# Altium PCB PCB1.PcbDoc
Units mil, origin at the board's own origin, x right, y up, seen from the top; angles counter-clockwise.
Board outline 1181.1 x 3897.64 mil, 2 copper layers (Top Layer, Bottom Layer); 49 components, 36 nets, 156 pads, 0 vias.
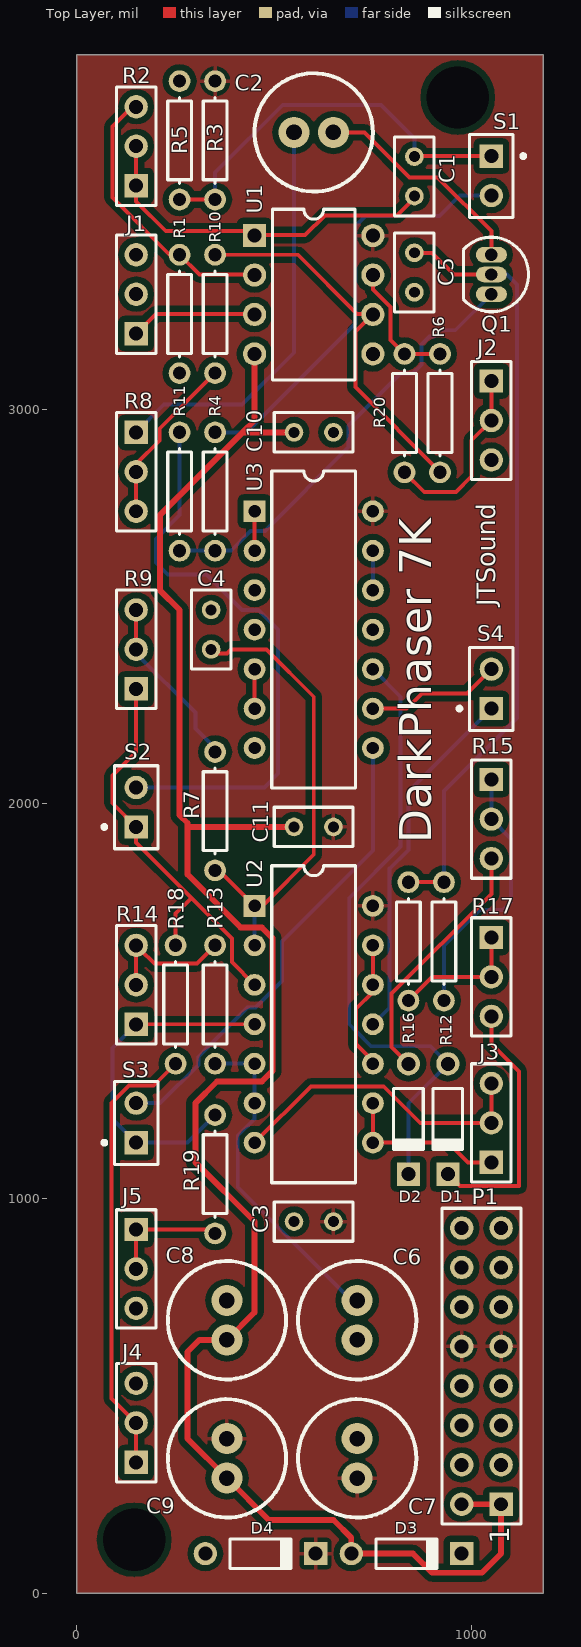
[diagram p0: Top Layer view]
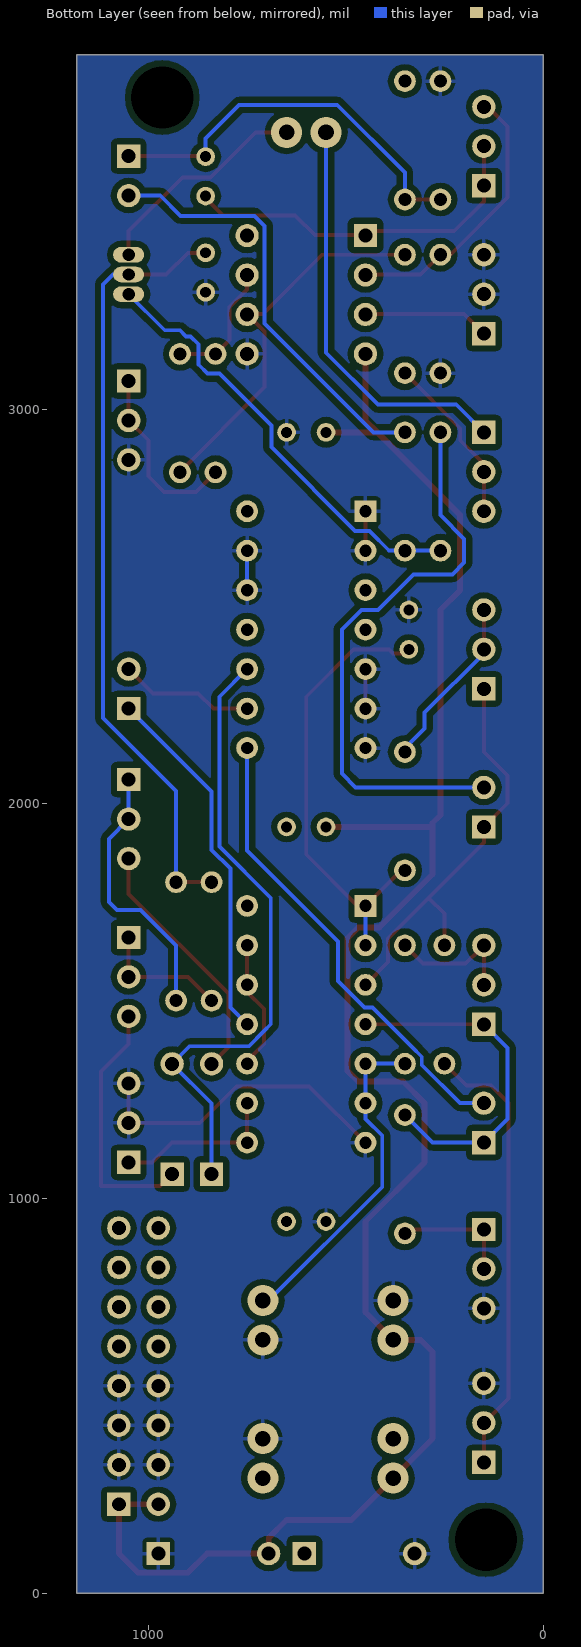
[diagram p1: Bottom Layer view, seen from below]

## Layer stack, top to bottom
Top Solder: solder mask 0.4, Solder Resist, Dk 3.5
Top Layer: signal copper 1.4
Dielectric 1: dielectric 12.6, FR-4, Dk 4.8
Bottom Layer: signal copper 1.4
Bottom Solder: solder mask 0.4, Solder Resist, Dk 3.5

## Board outline
0,3897.64 1181.1,3897.64 1181.1,0 0,0

## Design rules (kind name [scope] priority, off if disabled: settings)
Clearance [All] p1: gap=10 ignorepadtopadclearanceinfootprint=FALSE except(0: Arc-Hole Track-Hole SMDPad-Hole THPad-Hole Via-Hole Fill-Hole Poly-Hole Region-Hole Text-Hole; 15: Arc-Fill Arc-Poly Arc-Region Track-Fill Track-Poly Track-Region SMDPad-Fill SMDPad-Poly SMDPad-Region THPad-Fill THPad-Poly THPad-Region Via-Fill Via-Poly Via-Region Fill-Fill Fill-Poly Fill-Region Poly-Poly Poly-Region Region-Region)
PolygonConnect [All] p1: connectstyle=Relief reliefconductorwidth=10 reliefentries=4 polygonreliefangle="90 Angle" airgapwidth=10
RoutingVias [All] p1: holewidth=28 width=50 viastyle="Through Hole" minholewidth=28 minwidth=50 maxholewidth=28 maxwidth=50
SolderMaskExpansion [All] p1: expansion=4
Width [All] p1: maxlimit=50 minlimit=10 preferedwidth=20
30 further rules are at their usual default settings.

## Components (designator, comment, footprint, x,y, rotation, side; value= is the part's Value field where it differs from the comment)
C1 "Cap" RAD-0.1 855,3590 r270 top value=100n
C2 "Cap Pol1" "Cap Radial" 650,3701.34 r180 top value=10u
C3 "Cap" RAD-0.1 600,941.34 r180 top value=100pF
C4 "Cap" RAD-0.1 340,2441.34 r270 top value=330n
C5 "Cap Pol1" RAD-0.1 855,3346.34 r270 top value=1u
C6 "Cap Pol1" "Cap Radial" 710,741.34 r270 top value=4u7
C7 "Cap Pol1" "Cap Radial" 710,291.34 r90 top value=10u
C8 "Cap Pol1" "Cap Radial" 380,641.34 r90 top value=10u
C9 "Cap Pol1" "Cap Radial" 380,391.34 r270 top value=10u
C10 "Cap" RAD-0.1 600,2941.34 r180 top value=100pF
C11 "Cap" RAD-0.1 600,1941.34 r0 top value=100pF
D1 "Diode 1N4148" DO-35 940,1201.34 r270 top
D2 "Diode 1N4148" DO-35 840,1201.34 r270 top
D3 "Diode 1N4148" DO-35 835,100 r0 top
D4 "Diode 1N4148" DO-35 465,100 r0 top
J1 "Ext In" HDR1X3 150,3191.34 r90 top
J2 "Ext In" HDR1X3 1050,3071.34 r270 top
J3 "Ext Ctrl" HDR1X3 1050,1091.34 r90 top
J4 "OscOut" HDR1X3 150,331.34 r90 top
J5 "LFOOut" HDR1X3 150,921.34 r270 top
P1 "PowerBus" HDR2X8_CEN 1075,225 r90 top
Q1 "2N7000" SOT54 1050,3341.34 r180 top
R1 "" AXIAL-0.3 260,3241.34 r270 top value=10k
R2 "InGain" HDR1X3 150,3566.34 r90 top value=100k
R3 "" AXIAL-0.3 350,3681.34 r270 top value=10k
R4 "" AXIAL-0.3 350,2791.34 r270 top value=1k
R5 "" AXIAL-0.3 260,3681.34 r90 top value=10k
R6 "" AXIAL-0.3 920,2990 r270 top value=4k7
R7 "" AXIAL-0.3 350,1981.34 r90 top value=100R
R8 "OutGain" HDR1X3 150,2941.34 r270 top value=100k
R9 "FREQ" HDR1X3 150,2291.34 r90 top value=1K
R10 "" AXIAL-0.3 350,3241.34 r270 top value=10k
R11 "" AXIAL-0.3 260,2791.34 r270 top value=1k
R12 "" AXIAL-0.3 930,1651.34 r90 top value=1k
R13 "" AXIAL-0.3 350,1491.34 r90 top value=4k7
R14 "LFO" HDR1X3 150,1441.34 r90 top value=500k
R15 "Release" HDR1X3 1050,2061.34 r270 top value=100k
R16 "" AXIAL-0.3 840,1651.34 r90 top value=1k
R17 "Attack" HDR1X3 1050,1661.34 r270 top value=100k
R18 "" AXIAL-0.3 250,1491.34 r90 top value=100R
R19 "" AXIAL-0.3 350,1061.34 r90 top value=100R
R20 "" AXIAL-0.3 830,2990 r90 top value=1k
S1 "IN-SW" PIN2 1050,3641.34 r270 top
S2 "OSC-SW" PIN2 150,1941.34 r90 top
S3 "LFO-SW" PIN2 150,1141.34 r90 top
S4 "EXTOSC-SW" PIN2 1050,2241.34 r90 top
U1 "TL072ACJG" 693-02 600,3290 r270 top
U2 "MC14093BCL" 632-08 600,1441.34 r270 top
U3 "MC14071BCL" 632-08 600,2441.34 r270 top

## Footprints (in the part's own frame and the unit in brackets; to place one, negate y for a bottom-side part, rotate by r counter-clockwise, add the part's x,y. Pads: shape width x height; smd on the part's side, far side on the other; paste and mask are expansions set on the pad)
632-08 [mm] "DIP; 14 Leads; Row Spacing 7.62 mm; Pitch 2.54 mm"
  rect 1.4x1.4 hole 0.8: 1(-7.62,-3.81)
  round 1.4 hole 0.8: 2(-5.08,-3.81) 3(-2.54,-3.81) 4(0,-3.81) 5(2.54,-3.81) 6(5.08,-3.81) 7(7.62,-3.81) 8(7.62,3.81) 9(5.08,3.81) 10(2.54,3.81) 11(0,3.81) 12(-2.54,3.81) 13(-5.08,3.81) 14(-7.62,3.81)
  silkscreen extent -10.2,-2.7 10.2,2.7
693-02 [mm] "DIP; 8 Leads; Row Spacing 7.62 mm; Pitch 2.54 mm"
  rect 1.5x1.5 hole 0.9: 1(-3.81,-3.81)
  round 1.5 hole 0.9: 2(-1.27,-3.81) 3(1.27,-3.81) 4(3.81,-3.81) 5(3.81,3.81) 6(1.27,3.81) 7(-1.27,3.81) 8(-3.81,3.81)
  silkscreen extent -5.5,-2.65 5.5,2.65
AXIAL-0.3 [mm] "Axial Device, Thru-Hole; 2 Leads; 0.3 in Pin Spacing"
  round 1.4 hole 0.85: 1(-3.81,0) 2(3.81,0)
  silkscreen extent -2.77,-0.76 2.77,0.76
"Cap Radial" [mm]
  round 2 hole 1: 1(0,0) 2(2.54,0)
  silkscreen extent -2.54,-3.81 5.08,3.81
DO-35 [mm] "Diode, Axial; Body 3.8 x 1.9 mm (LxDia. max), Lead Dia. 0.53 mm (max)"
  round 1.5 hole 0.9: 1(-3.55,0)
  rect 1.5x1.5 hole 0.9: 2(3.55,0)
  silkscreen extent -1.95,-0.95 2.05,0.95
HDR1X3 [mm] "Connector; Header; 3 Position"
  rect 1.5x1.5 hole 0.9: 1(0,0)
  round 1.5 hole 0.9: 2(2.54,0) 3(5.08,0)
  silkscreen extent -1.27,-1.27 6.35,1.27
HDR2X8_CEN [mm] "Connector; Header; 8x2 Position"
  rect 1.5x1.5 hole 0.9: 1(0,0)
  round 1.5 hole 0.9: 2(2.54,0) 3(5.08,0) 4(7.62,0) 5(10.16,0) 6(12.7,0) 7(15.24,0) 8(17.78,0) 9(0,2.54) 10(2.54,2.54) 11(5.08,2.54) 12(7.62,2.54) 13(10.16,2.54) 14(12.7,2.54) 15(15.24,2.54) 16(17.78,2.54)
  silkscreen extent -1.27,-1.27 19.05,3.81
PIN2 [mm] "Photosensitive Diode; 2 Leads"
  rect 1.5x1.5 hole 0.9: 1(0,0)
  round 1.5 hole 0.9: 2(2.54,0)
  silkscreen extent -1.4,-1.4 3.94,2.18
RAD-0.1 [mm] "Radial Cap, Thru-Hole; 2 Leads; 0.1 in Pin Spacing"
  round 1.2 hole 0.7: 1(-1.27,0) 2(1.27,0)
  silkscreen extent -2.54,-1.27 2.54,1.27
SOT54 [mm] "TO, Flat Index; 3 In-Line, Axial Leads; Body Dia. 4.6mm; Leads 0.48 x 0.45 mm (max)"
  oval 2x1 hole 0.8: 1(0,1.27) 2(0,0) 3(0,-1.27)
  silkscreen extent -2.4,-2.4 1.8,2.4

## Part data
C1 C3 C4 C10 C11: "Capacitor", LatestRevisionDate=17-Jul-2002, LatestRevisionNote="Re-released for DXP Platform.", PackageDescription="Radial Cap, Thru-Hole; 2 Leads; 0.3 in Pin Spacing", PackageReference=RAD-0.3, Published=8-Jun-2000, Publisher="Altium Limited"
C2 C5 C6 C7 C8 C9: "Polarized Capacitor (Radial)", LatestRevisionDate=17-Jul-2002, LatestRevisionNote="Re-released for DXP Platform.", PackageDescription="Polarized Capacitor (Radial); 2 Leads", PackageReference=RB7.6-15, Published=8-Jun-2000, Publisher="Altium Limited"
D1 D2 D3 D4: "High Conductance Fast Diode", Code_JEDEC=DO-204-AH, ComponentLink1Description="Manufacturer Link", ComponentLink1URL=http://www.fairchildsemi.com/, ComponentLink2Description=Datasheet, ComponentLink2URL=http://www.fairchildsemi.com/ds/1N%2F1N4148.pdf, DatasheetVersion=1997, LatestRevisionDate=17-Jul-2002, LatestRevisionNote="Re-released for DXP Platform.", PackageDescription="Diode, Axial; Body 3.8 x 1.9 mm (LxDia. max), Lead Dia. 0.53 mm (max)", PackageReference=DO-35, Published=8-Jun-2000, Publisher="Altium Limited"
J1 J2 J3 J4 J5: library part "Phonejack2 TN", "Jack Socket, 1/4\" [6.5mm], Thru-Hole, Vertical, 2-Conductor with Tip closed", PackageDocument=2003, ComponentLink1Description="Manufacturer Link", ComponentLink1URL=http://www.cliffuk.co.uk/, DatasheetDocument=2003, DrillAndSlotSize="Corresponds to nominal value.", LatestRevisionDate=15-Jul-2004, LatestRevisionNote="Component Replaced & renamed from \"Phonejack\".", PackageReference=S1VS_SNB, PCB_Layout="Complies with manufacturer's recommendation.", Publisher="Altium Limited"
P1: library part "Header 8X2A", "Header, 8-Pin, Dual row", LatestRevisionDate=17-Jul-2002, LatestRevisionNote="Re-released for DXP Platform.", Publisher="Altium Limited"
Q1: "N-channel Enhancement Mode Field-effect Transistor", Code_JEDEC=TO-92, Code_JEITA=SC-43, ComponentLink1Description="Manufacturer Link", ComponentLink1URL=http://www.semiconductors.philips.com/, ComponentLink2Description=Datasheet, ComponentLink2URL=http://www.semiconductors.philips.com/acrobat/datasheets/2N7000-03.pdf, DatasheetVersion=19-May-2000, LatestRevisionDate=12-Dec-2006, LatestRevisionNote="Footprint pad sequence fixed.", PackageDescription="Plastic Single-Ended Leaded (through hole) package; 3 Leads (TO-92)", PackageReference=SOT54, PackageVersion=Feb-1997, Published=17-Sep-2003, Publisher="Altium Limited"
R1 R3 R4 R5 R6 R7 R10 R11 R12 R13 R16 R18 R19 R20: library part Res1, "Resistor", LatestRevisionDate=17-Jul-2002, LatestRevisionNote="Re-released for DXP Platform.", PackageDescription="Axial Device, Thru-Hole; 2 Leads; 0.3 in Pin Spacing", PackageReference=AXIAL-0.3, Published=8-Jun-2000, Publisher="Altium Limited"
R2 R8 R9 R14 R15 R17: library part RPot, "Potentiometer", LatestRevisionDate=17-Jul-2002, LatestRevisionNote="Re-released for DXP Platform.", PackageDescription="Variable Resistor, Thru-Hole; 3 Leads", PackageReference=VR5, Published=8-Jun-2000, Publisher="Altium Limited", Set Position=0.5, Sim Note="Enter the Resistance value and the set point into parameter fields."
S1 S2 S3 S4: library part SW-SPST, "Single-Pole, Single-Throw Switch", LatestRevisionDate=17-Jul-2002, LatestRevisionNote="Re-released for DXP Platform.", PackageDescription="Switch; 2 Leads", PackageReference=SPST-2, Published=24-Mar-1999, Publisher="Altium Limited"
U1: "Low-Noise JFET-Input Operational Amplifier", Code_JEDEC=MO-001-AN, ComponentLink1Description="Manufacturer Link", ComponentLink1URL=http://www.onsemi.com/site/products/parametrics/0,4446,251,00.html, DatasheetVersion=1988, LatestRevisionDate=06-Jun-2005, LatestRevisionNote="Stylized 3D Model Added.", PackageDescription="DIP; 8 Leads; Row Spacing 7.62 mm; Pitch 2.54 mm", PackageReference=693-02, Published=17-Jul-2002, Publisher="Altium Limited"
U2: "Quad 2-Input NAND Schmitt Trigger", ComponentLink1Description="Manufacturer Link", ComponentLink1URL=http://www.onsemi.com/, ComponentLink2Description=Datasheet, ComponentLink2URL=http://www.onsemi.com/pub/Collateral/MC14093B-D.PDF, DatasheetVersion=1995, PackageDescription="DIP; 14 Leads; Row Spacing 7.62 mm; Pitch 2.54 mm", PackageReference=632-08, PackageVersion=1995, Published=15-Apr-2002, Publisher="Altium Limited"
U3: "Quad 2-Input OR Gate", ComponentLink1Description="Manufacturer Link", ComponentLink1URL=http://www.onsemi.com/, ComponentLink2Description=Datasheet, ComponentLink2URL=http://www.onsemi.com/pub/Collateral/MC14001B-D.PDF, DatasheetVersion=1995, PackageDescription="DIP; 14 Leads; Row Spacing 7.62 mm; Pitch 2.54 mm", PackageReference=632-08, PackageVersion=1995, Published=15-Apr-2002, Publisher="Altium Limited"

## Free pads (board coordinates)
  round 0 hole 157.48 paste+0: 2(145,135) 2(965,3790)

## Nets (pads, with @x,y where several pads share a name; then routed paths per layer and width w, separated by ;. In a path a pad name is that pad's centre, name@x,y a point inside that pad or via, vN(x,y) a via of type N, cw(c..) or ccw(c..) an arc to the next point about the centre after c; other vN are vias at no path point)
-VCC: C8.1 C9.2 C10.2 C11.1 D3.1 P1.1 P1.9 U1.4 | length 4920.6
  Top Layer w15: U1.4@450,3141.34 U1.4 450,2971.34 420,2941.34 ; C11.1 280,1941.34 ; C10.2 420,2941.34 ; P1.9 P1.1 1075,100 1026.34,51.34 900,51.34 851.34,100 701.34,100 695,106.34 695,140 650,185 486.34,185 C9.2 280,391.34 280,611.34 310,641.34 C8.1 450,711.34 450,941.34 300,1091.34 300,1241.34 354.94,1296.28 468.66,1296.28 495.06,1322.67 495.06,1660 468.66,1686.4 414.94,1686.4 280,1821.34 280,1941.34 ; 280,1941.34 280,1951.34 260,1971.34 260,2491.34 210,2541.34 210,2731.34 420,2941.34
GND: C3.2 C4.1 C5.2 C6.2 C7.2 C8.2 C10.1 D3.2 D4.1 J1.2 J1.3 J2.3 J3.2 J3.3 J4.3 J5.3 P1.2 P1.3 P1.4 P1.10 P1.11 P1.12 R1.2 R5.2 U1.5 U2.7 U3.1 U3.2 U3.5 U3.6 U3.7 U3.12 U3.13 | length 1097.4
  Top Layer w10: U2.7 592.56,1283.9 777.44,1283.9 870,1191.34 J3.2 J3.3 ; U3.6 U3.5 ; U3.2 U3.1
  Bottom Layer w10: U3.12 U3.13
NetC1_1: C1.1 R3.2 R5.1 S1.1 | length 1003.5
  Top Layer w10: R5.1 R3.2 ; C1.1@861.25,3641.34 S1.1
  Bottom Layer w10: R3.2 350,3599.86 521.48,3771.34 770,3771.34 855,3686.34 C1.1@855,3641.34
NetC1_2: C1.2 R2.1 R2.2 U1.1 | length 932.5
  Top Layer w10: R2.2 R2.1 150,3526.34 225,3451.34 440,3451.34 450,3441.34 578.28,3441.34 628.28,3491.34 811.34,3491.34 851.34,3531.34 C1.2@870,3531.34
NetC2_1: C2.1 Q1.3 | length 563.6
  Top Layer w10: C2.1 728.66,3701.34 842.58,3587.42 913.92,3587.42 1050,3451.34 Q1.3
NetC2_2: C2.2 R8.1 | length 1041.9
  Bottom Layer w10: R8.1 220,3011.34 418.37,3011.34 550,3142.97 C2.2
NetC4_2: C4.2 R7.1 U2.1 U2.2 | length 1165
  Top Layer w10: C4.2 340,2381.34 380,2381.34 390,2391.34 480,2391.34 600,2271.34 600,1871.34 470,1741.34 U2.1 360,1831.34 R7.1
  Bottom Layer w10: U2.2 U2.1
NetC5_1: C5.1 Q1.2 R12.2 R16.2 | length 1974.8
  Top Layer w10: R16.2 R12.2 ; C5.1 900,3396.34 955,3341.34 Q1.2
  Bottom Layer w10: R12.2 930,2032.28 1115,2217.28 1115,3316.34 1090,3341.34 Q1.2
NetC6_1: C6.1 R13.1 U2.5 U2.6 | length 851.5
  Bottom Layer w10: R13.1 U2.5 U2.6 450,1201.53 407.44,1158.97 407.44,1029.28 695.38,741.34 C6.1
NetD1_1: D1.1 D2.2 U3.10 | length 1595.4
  Bottom Layer w10: U3.10 820,2271.34 820,1891.34 690,1761.34 690,1441.34 707.44,1423.9 707.44,1423.71 745.52,1385.63 895.47,1385.63 D1.1 840,1241.1 D2.2
NetD1_2: D1.2 R17.3 | length 651.5
  Top Layer w10: D1.2 970.24,1031.34 1120,1031.34 1120,1321.34 1050,1391.34 R17.3
NetD2_1: D2.1 R15.3 | length 642.5
  Top Layer w10: D2.1 797.44,1383.66 797.44,1518.97 1050,1771.53 R15.3
NetJ1_1: J1.1 U1.3 | length 320.7
  Top Layer w10: J1.1 200,3241.34 U1.3@450,3241.34
NetJ2_1: J2.1 J2.2 R20.1 | length 469.3
  Top Layer w10: R20.1 880,2790 960,2790 1000,2830 1000,2921.34 J2.2 J2.1
NetJ3_1: J3.1 U2.8 U2.9 | length 420.7
  Top Layer w10: U2.9 U2.8 940.5,1141.34 990.5,1091.34 J3.1
NetJ4_1: J4.1 J4.2 R18.1 | length 1139.8
  Top Layer w10: J4.1 J4.2 87.84,493.5 87.84,1242.15 131.56,1285.87 194.53,1285.87 R18.1
NetJ5_1: J5.1 J5.2 R19.1 | length 304.1
  Top Layer w10: J5.2 J5.1 340,921.34 R19.1
NetQ1_1: Q1.1 R4.2 R11.2 | length 1121.4
  Bottom Layer w10: R11.2 R4.2 389.81,2641.34 439.81,2691.34 476.33,2691.34 688.62,2903.63 688.62,2958.81 819.81,3090 850,3090 872.56,3112.56 872.56,3163.56 893.26,3184.26 904.26,3184.26 920,3200 958.66,3200 Q1.1
NetR1_1: R1.1 R2.3 U1.2 | length 698.6
  Top Layer w10: R2.3@145,3771.34 90,3716.34 90,3536.34 235,3391.34 R1.1 310,3341.34 U1.2@450,3341.34
NetR4_1: R4.1 S1.2 | length 1093.5
  Bottom Layer w10: R4.1 430,2941.34 705.47,3216.81 705.47,3464.31 731.16,3490 918.66,3490 970,3541.34 S1.2
NetR6_1: R6.1 R20.2 U1.7 | length 304.5
  Top Layer w10: U1.7 750,3302.97 794.53,3258.44 794.53,3175.47 R20.2 900,3140 R6.1@900,3141.34
NetR6_2: R6.2 R10.1 U1.6 | length 969.4
  Top Layer w10: R10.1 560,3391.34 710,3241.34 750,3241.34 705.47,3196.81 705.47,3055.87 R6.2@920,2841.34
NetR7_2: R7.2 R9.2 R9.3 | length 442.8
  Top Layer w10: R9.2 R9.3
  Bottom Layer w10: R9.2 150,2381.34 300,2231.34 300,2191.34 350,2141.34 R7.2
NetR8_2: R8.2 R8.3 R10.2 | length 433
  Top Layer w10: R8.3 R8.2 150,2861.07 209.82,2920.89 209.82,2951.35 349.81,3091.34 R10.2
NetR9_1: R9.1 R18.2 S2.1 U2.3 | length 1060.7
  Top Layer w10: R9.1 150,2131.34 90,2071.34 90,2001.34 S2.1 150,1901.53 290,1761.53 ; R18.2 250,1721.53 290,1761.53 ; U2.3 392.56,1598.78 392.56,1658.97 290,1761.53
NetR11_1: R11.1 S2.2 | length 1474.7
  Bottom Layer w10: S2.2 474.77,2041.34 510,2076.57 510,2441.53 460.19,2491.34 417.82,2491.34 327.82,2581.34 230,2581.34 200,2611.34 200,2671.34 260,2731.34 R11.1
NetR12_1: R12.1 R15.1 R15.2 | length 686.3
  Bottom Layer w10: R12.1 930,1641.34 1020,1731.34 1080,1731.34 1100,1751.34 1100,1911.34 R15.2 R15.1
NetR13_2: R13.2 R14.2 R14.3 | length 332.5
  Top Layer w10: R14.2 150,1621.34 160,1631.34 196.34,1595 303.66,1595 R13.2
  Top Layer w15: R14.3 R14.3@160,1631.34
NetR14_1: R14.1 R19.2 S3.1 U2.4 | length 878.7
  Top Layer w10: R14.1 U2.4
  Bottom Layer w10: R14.1 90,1381.34 90,1201.34 S3.1 280,1141.34 R19.2
NetR16_1: R16.1 R17.1 R17.2 | length 334.9
  Top Layer w10: R16.1 900,1561.34 R17.2 R17.1
NetS3_2: S3.2 U3.8 | length 1195.7
  Bottom Layer w10: S3.2 210.19,1241.34 307.44,1338.59 307.44,1358.97 332.37,1383.9 432.37,1483.9 452.75,1483.9 520,1551.15 520,1651.15 750,1881.15 U3.8
NetS4_1: S4.1 U2.11 | length 924.3
  Bottom Layer w10: U2.11 792.56,1483.9 792.56,1835.61 840,1883.05 840,2031.34 S4.1
NetS4_2: S4.2 U3.9 | length 341.4
  Top Layer w10: U3.9 835.38,2241.34 874,2279.96 988.62,2279.96 S4.2
NetU2_10: U2.10 U2.12 U2.13 | length 335.3
  Top Layer w10: U2.10 750,1348.78 707.44,1391.34 707.44,1480.6 750,1523.15 U2.12 U2.13
VCC: C3.1 C7.1 C9.1 C11.2 D4.2 P1.5 P1.13 R3.1 U1.8 U2.14 U3.14 | length 23.8
  Top Layer w10: R3.1@350,3824.45 R3.1 ; U1.8@733.11,3441.34 U1.8@750,3441.34
VDD: 
pads on no net: P1.6 P1.7 P1.8 P1.14 P1.15 P1.16 U3.3 U3.4 U3.11

## Polygon pours and split planes (outlines as drawn)
VCC on Top Layer "Bottom Layer-No Net" (solid, remove dead copper, pour order 2): 0,3897.64 1181.1,3897.64 1181.1,0 0,0
GND on Bottom Layer "Bottom Layer-No Net" (solid, remove dead copper, pour order 0): 0,3897.64 1181.1,3897.64 1181.1,0 0,0

## Silkscreen, mask and mechanical layers (free items; w line width, h text height)
Top Overlay:
  text "JTSound" at 1075,2500 h80 r90
  text "DarkPhaser 7K" at 925,1900 h140 r90
Mechanical 1:
  the board outline again, w10

## Text inside footprints (layer, text, board x,y; h text height)
P1: Top Overlay "1" at 1095,125 h50 r90